# Altium PCB rtls.PcbDoc
Units mil, origin at the board's own origin, x right, y up, seen from the top; angles counter-clockwise.
Board outline 3741 x 1772 mil, 2 copper layers (Top Layer, Bottom Layer), stack 61.756 mil thick; 78 components, 68 nets, 274 pads, 103 vias.
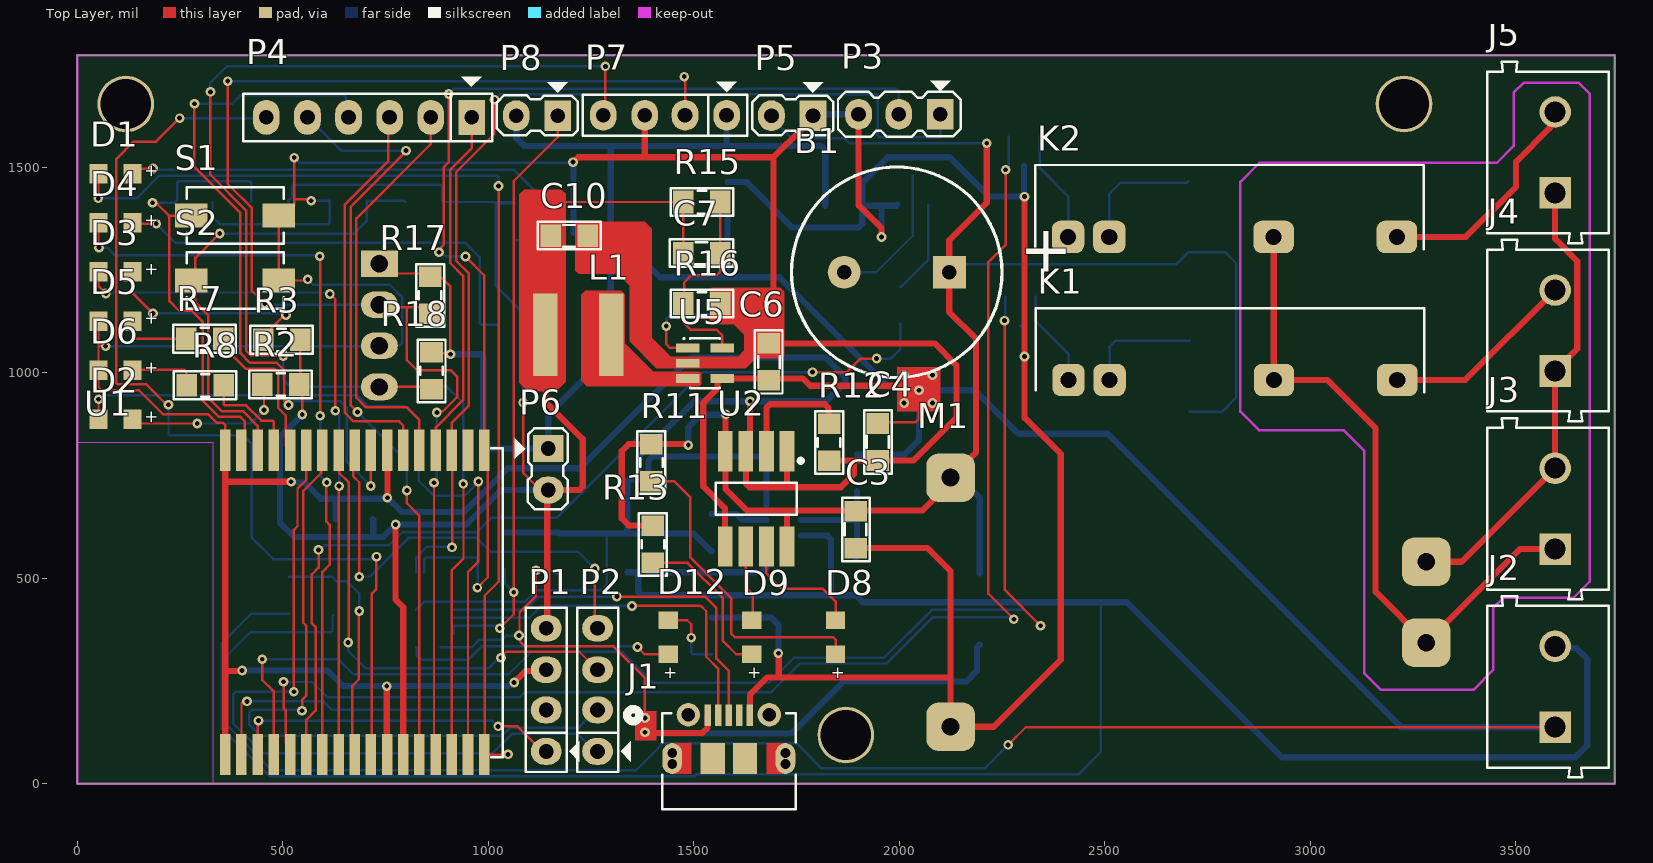
[diagram p0: Top Layer view]
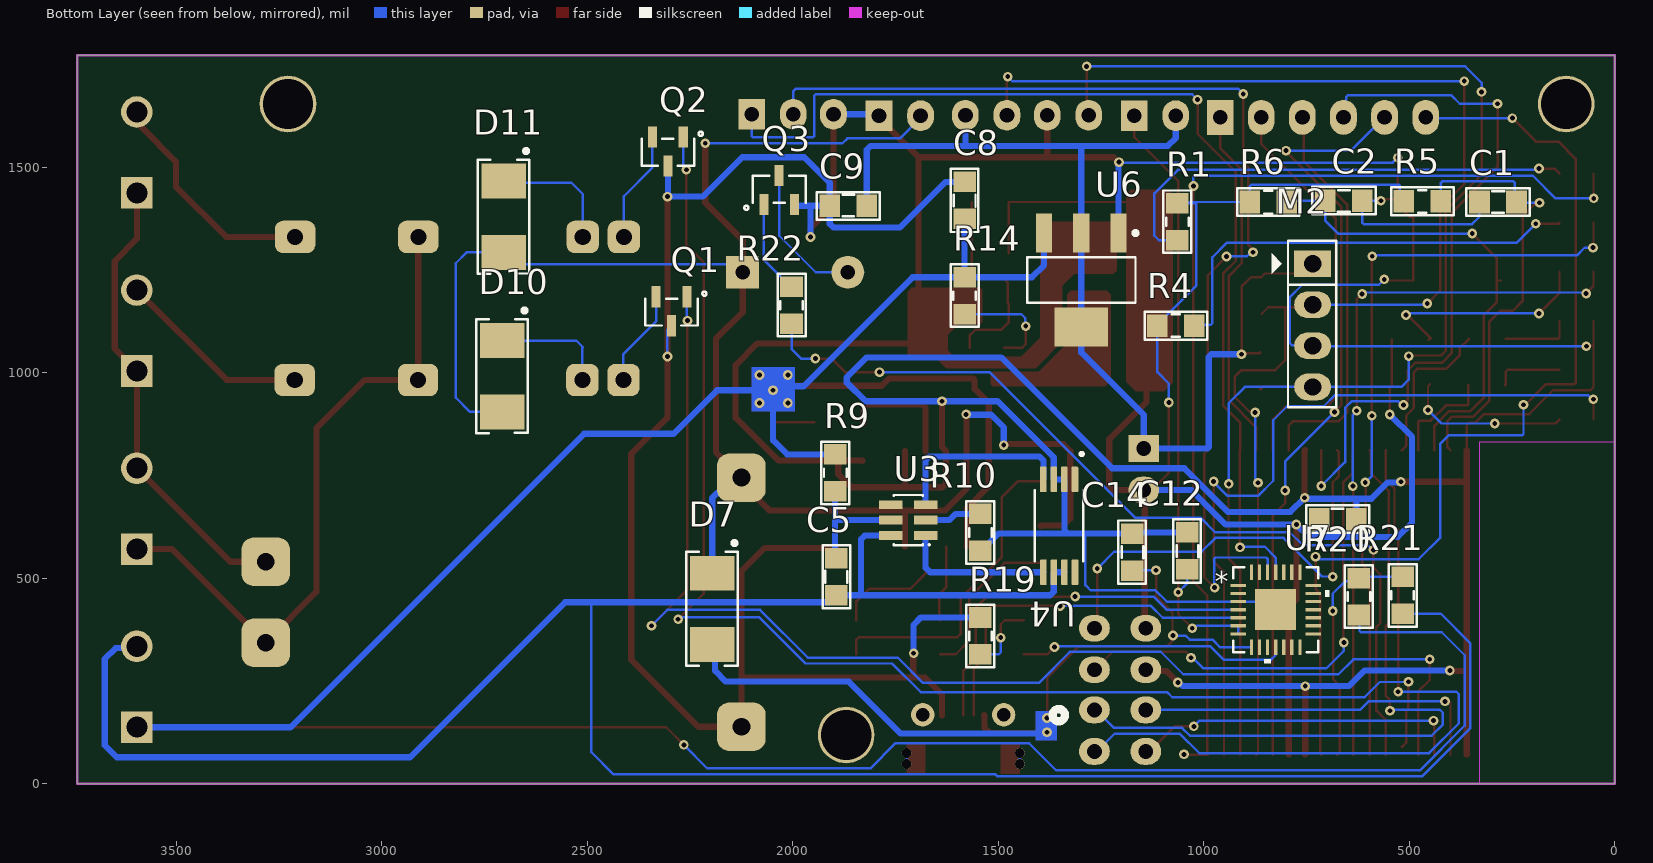
[diagram p1: Bottom Layer view, seen from below]
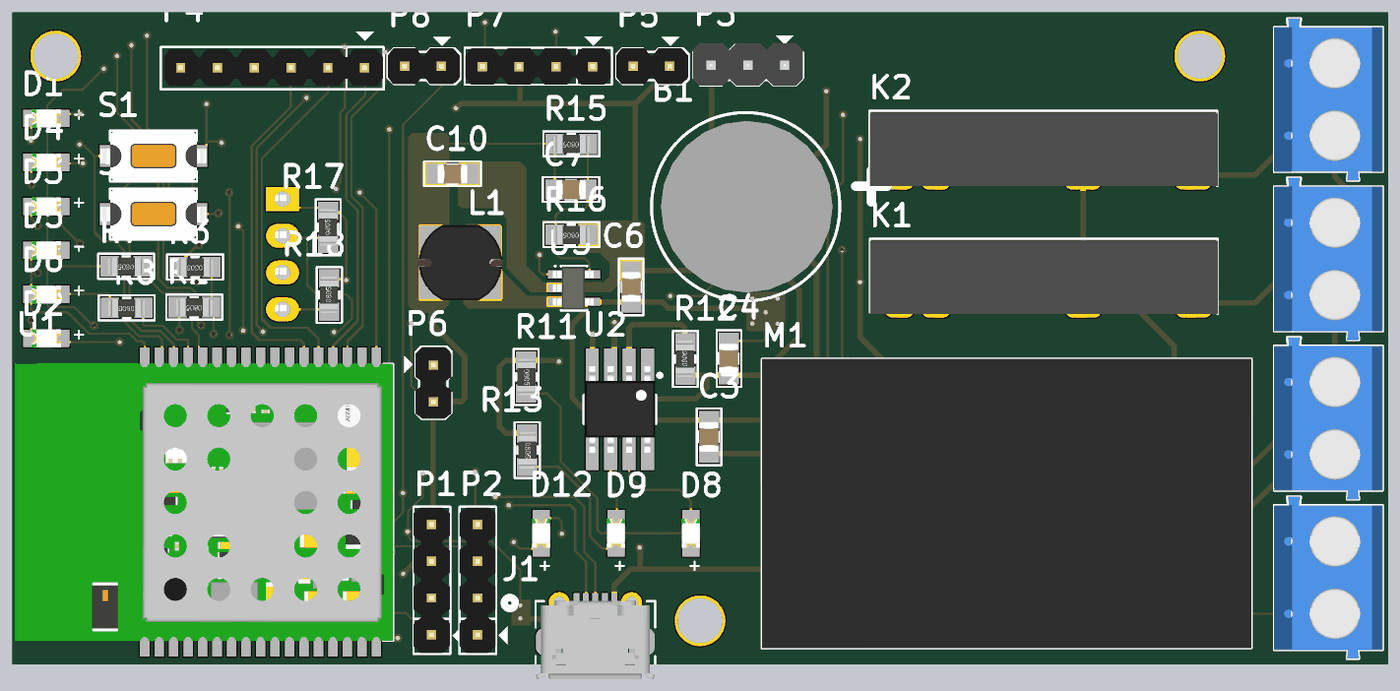
[diagram p2: 3D render of the assembled board from above, using the file's embedded part models]
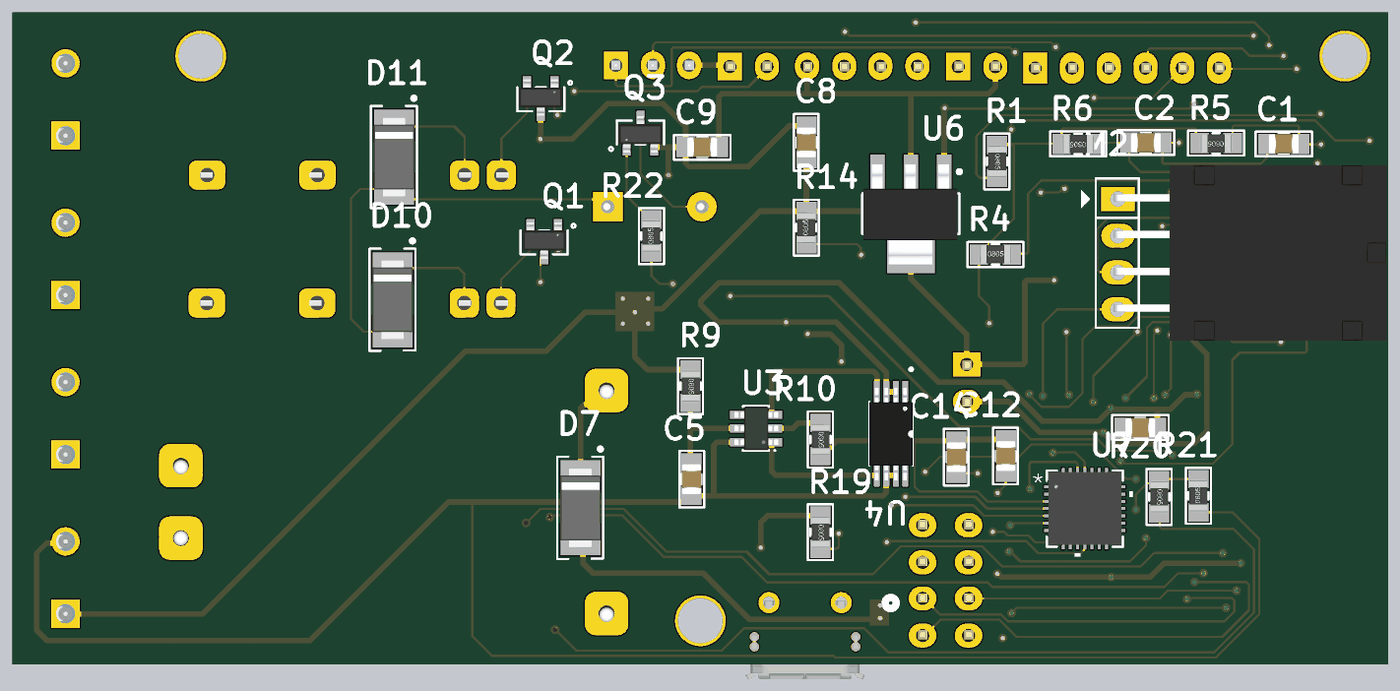
[diagram p3: 3D render of the assembled board from below, using the file's embedded part models]

## Layer stack, top to bottom
Top Solder: solder mask 1, SM-001, Dk 4
Top Layer: signal copper 1.378
Dielectric 1: core 59, Core-043, Dk 4.3
Bottom Layer: signal copper 1.378
Bottom Solder: solder mask 1, SM-001, Dk 4

## Board outline
0,0 0,1772 3741,1772 3741,0

## Design rules (kind name [scope] priority, off if disabled: settings)
Clearance [All] p1: gap=8 ignorepadtopadclearanceinfootprint=FALSE
HoleSize [All] p1: absolutevalues=TRUE maxlimit=157.48 minlimit=11.81 maxpercent=80.000 minpercent=20.000
HoleToHoleClearance [All] p1: gap=3 allowstackedmicrovias=TRUE
MinimumSolderMaskSliver [All] p1: minsoldermaskwidth=0
PlaneConnect [All] p1: planeconnectstyle=Direct reliefexpansion=20 reliefentries=4 reliefconductorwidth=10 reliefairgap=10
PolygonConnect [All] p1: connectstyle=Relief reliefconductorwidth=10 reliefentries=4 polygonreliefangle="90 Angle" airgapwidth=10
RoutingVias [All] p1: holewidth=11.81 width=23.62 viastyle="Through Hole" minholewidth=11.81 minwidth=23.62 maxholewidth=11.81 maxwidth=23.62
SilkToSilkClearance [All] p1: silktosilkclearance=0
SilkToSolderMaskClearance [IsPad] p1: minsilkscreentomaskgap=0 clearancetoexposedcopper=TRUE
SolderMaskExpansion [All] p1: expansion=4 istentingtop=FALSE
Width [All] p1: maxlimit=15 minlimit=6 preferedwidth=10
24 further rules are at their usual default settings.

## Classes and differential pairs
component class serial: C12 C14 D12 P8 R19 U7
component class power_supply: C3 C4 C5 C6 C7 C8 C9 C10 D7 D8 D9 J1 J2 J3 L1 M1 P5 P6 R9 R10 R11 R12 R13 R14 R15 R16 R20 R21 U2 U3 U4 U5 U6
component class main: "   " C1 C2 D1 D2 D3 D4 D5 D6 P1 P2 P4 R1 R2 R3 R4 R5 R6 R7 R8 S1 S2 U1
component class io_sensor: B1 D10 D11 J4 J5 K1 K2 M2 P7 Q1 Q2 Q3 R17 R18 R22

## Components (designator, comment, footprint, x,y, rotation, side; value= is the part's Value field where it differs from the comment)
B1 "Buzzer" BUZZER 2121.91,1244 r180 top locked
C1 "Cap-100nF-50V-0805" CAP-SM-0805 329,1415 r180 bottom value=100nF/50V
C2 "Cap-100nF-50V-0805" CAP-SM-0805 614,1418 r0 bottom value=100nF/50V
C3 "Cap-10uF-50V-0805" CAP-SM-0805 1894,573 r90 top value=10uF/50V
C4 "Cap-10uF-50V-0805" CAP-SM-0805 1948,786 r90 top value=10uF/50V
C5 "Cap-100nF-50V-0805" CAP-SM-0805 1894,458 r90 bottom value=100nF/50V
C6 "Cap-4.7uF-50V-0805" CAP-SM-0805 1683,1071 r270 top value=4.7uF/50V
C7 "Cap-22pF-50V-0805" CAP-SM-0805 1564,1290.5 r180 top value=1nF/50V
C8 "Cap-10uF-50V-0805" CAP-SM-0805 1582,1464 r270 bottom value=10uF/50V
C9 "Cap-100nF-50V-0805" CAP-SM-0805 1910,1406 r180 bottom value=100nF/50V
C10 "Cap-10uF-50V-0805" CAP-SM-0805 1242,1333 r180 top value=10uF/50V
C12 "Cap-100nF-50V-0805" CAP-SM-0805 1040,611 r270 bottom value=100nF/50V
C14 "Cap-100nF-50V-0805" CAP-SM-0805 1174,608 r270 bottom value=100nF/50V
C15 "Cap-100nF-50V-0805" CAP-SM-0805 629,643 r0 bottom value=100nF/50V
D1 "Red, 2V" WL-SMCW_0805 93,1484 r0 top
D2 "Green, 3.2V" WL-SMCW_0805 93,886 r0 top
D3 "Blue, 3.2V" WL-SMCW_0805 93,1244.8 r0 top
D4 "Yellow, 2V" WL-SMCW_0805 93,1364.4 r0 top
D5 "Red, 2V" WL-SMCW_0805 93,1125.2 r0 top
D6 "Red, 2V" WL-SMCW_0805 93,1005.6 r0 top
D7 "SS24" SS24 2196,425 r270 bottom
D8 "Red, 2V" WL-SMCW_0805 1845,356 r270 top
D9 "Green, 3.2V" WL-SMCW_0805 1641.5,356 r270 top
D10 "SS24" SS24 2707,991 r270 bottom
D11 "SS24" SS24 2703,1379 r270 bottom
D12 "Red, 2V" WL-SMCW_0805 1438,356 r270 top
J1 "105017-0001" MICRO-USB-FEMALE 1585.37,54.32 r0 top
J2 "691102710002" 691102710002 3578.28,235.42 r90 top locked
J3 "691102710002" 691102710002 3578.28,668.81 r90 top locked
J4 "691102710002" 691102710002 3578.28,1102.19 r90 top locked
J5 "691102710002" 691102710002 3578.28,1535.57 r90 top locked
K1 "G3MB-202P DC5" G3MB 2412,982 r0 top
K2 "G3MB-202P DC5" G3MB 2411,1330 r0 top
L1 "2.2uH/3.5A" CD53 1219,1092 r180 top
M1 "HLK-PM01" HLK-PM01 3282.48,539.57 r180 top locked
M2 "AM2320" AM2320 735,1265 r270 bottom locked
P1 "Header 4" JP4 1141,178 r90 top locked
P2 "Header 4" JP4 1266,178 r90 top locked
P3 "Header 3" JP3 2000,1628.5 r180 top
P4 "Header 6" JP6 960,1621 r180 top
P5 "Header 2" JP2 1790,1625 r180 top
P6 "Header 2" JP2 1146,815 r270 top
P7 "Header 4" JP4 1480,1626 r180 top
P8 "Header 2" JP2 1169,1625 r180 top
Q1 "IRLML6402TRPBF" SOT23_NEX 2295,1147 r0 bottom
Q2 "IRLML6402TRPBF" SOT23_NEX 2304,1536 r0 bottom
Q3 "MMBT3904-1AM" SOT23_NEX 2033,1446 r180 bottom
R1 "Res-1K-0805" RES-SM-0805 1064,1412 r270 bottom value=1K
R2 "Res-1K-0805" RES-SM-0805 540,971 r180 top value=1K
R3 "Res-1K-0805" RES-SM-0805 542,1080 r180 top value=1K
R4 "Res-1K-0805" RES-SM-0805 1113,1114 r180 bottom value=1K
R5 "Res-10k-0805" RES-SM-0805 423,1417 r0 bottom value=10K
R6 "Res-10k-0805" RES-SM-0805 798,1415 r0 bottom value=10K
R7 "Res-1K-0805" RES-SM-0805 355,1082 r180 top value=1K
R8 "Res-1K-0805" RES-SM-0805 356,969 r180 top value=1K
R9 "Res-100-0805" RES-SM-0805 1897,801 r270 bottom value=100
R10 "Res-1K-0805" RES-SM-0805 1544,656 r270 bottom value=1K
R11 "Res-1K-0805" RES-SM-0805 1397,826 r270 top value=1K
R12 "Res-1.2K-0805" RES-SM-0805 1830,785 r90 top value=1.2K
R13 "Res-1K-0805" RES-SM-0805 1400,627 r270 top value=1K
R14 "Res-10k-0805" RES-SM-0805 1582,1142 r90 bottom value=10K
R15 "Res-47K-0805" RES-SM-0805 1565,1415 r180 top value=47K
R16 "Res-10k-0805" RES-SM-0805 1565,1168 r180 top value=10K
R17 "Res-4.7K-0805" RES-SM-0805 859,1143 r90 top value=4.7K
R18 "Res-4.7K-0805" RES-SM-0805 862,959 r90 top value=4.7K
R19 "Res-1K-0805" RES-SM-0805 1544,404 r270 bottom value=1K
R20 "Res-12K-0805" RES-SM-0805 623,500 r270 bottom value=12K
R21 "Res-10k-0805" RES-SM-0805 516,413 r90 bottom value=10K
R22 "Res-15K-0805" RES-SM-0805 2003,1119 r90 bottom value=15K
S1 "434113043826" 434113043826 384,1382 r0 top locked
S2 "434113043826" 434113043826 384,1224 r0 top locked
U1 "DWM1001" DWM1001 1035.39,64.15 r90 top locked
U2 "TP4056" SOP8 1573.89,809.51 r270 top locked
U3 "DW01A" SOT-23-6 1719,641 r90 bottom
U4 "FS8205A" TSSOP8 1351.8,627.01 r270 bottom
U5 "RT8059" SOT-23-5 1527.32,1022.6 r270 top locked
U6 "AMS1117" SOT223 1298,1225 r270 bottom
U7 "CP2102-GM" QFN28_5X5_SIL 825,423 r180 bottom

## Footprints (in the part's own frame and the unit in brackets; to place one, negate y for a bottom-side part, rotate by r counter-clockwise, add the part's x,y. Pads: shape width x height; smd on the part's side, far side on the other; paste and mask are expansions set on the pad)
434113043826 [mm] "SMD Tact Switch, body 6x3.5mm"
  rect 2x1.5 smd: 1(-2.7,0) 2(2.7,0)
  silkscreen extent -3,-1.75 3,1.75, body extent -3.65,-1.75 3.65,1.75, height 4.3
691102710002 [mm] "5,00mm - modular - blue - Horizontal entry with pressure clamp - 9,9 mm height - 02p"
  rect 1.95x1.95 hole 1.3: 1(-2.5,-0.45)
  round 1.95 hole 1.3: 2(2.5,-0.45)
  silkscreen extent -5.6,-3.75 5.6,3.75, body extent -5.6,-3.75 5.6,3.75, height 9.96
AM2320 [mil]
  rect 65x90 hole 42: 1(0,0)
  oval 65x90 hole 42: 2(100,0) 3(200,0) 4(300,0)
  silkscreen extent -56,-100 350,57, body extent -91,-11 385,731, height 192
BUZZER [mil]
  rect 80x80 hole 36: 1(0,0)
  round 80 hole 36: 2(255.91,0)
  silkscreen extent -128,-256 384,256, body extent -108,-233 358,233, height 226
CAP-SM-0805 [mil]
  rect 50x55 smd: 1(0,0) 2(90,0)
  silkscreen extent -32,-34 122,33, body extent 4,-27 86,27, height 30
CD53 [mil]
  rect 60x200 smd: 1(-80,0) 2(80,0.01)
  body extent -114,-102 114,102, height 177
DWM1001 [mm] "DWM1001 MODULE"
  rect 2.54x0.65 smd: 1(0.16,17.15) 2(0.16,16.15) 3(0.16,15.15) 4(0.16,14.15) 5(0.16,13.15) 6(0.16,12.15) 7(0.16,11.15) 8(0.16,10.15) 9(0.16,9.15) 10(0.16,8.15) 11(0.16,7.15) 12(0.16,6.15) 13(0.16,5.15) 14(0.16,4.15) 15(0.16,3.15) 16(0.16,2.15) 17(0.16,1.15) 18(18.97,1.15) 19(18.97,2.15) 20(18.97,3.15) 21(18.97,4.15) 22(18.97,5.15) 23(18.97,6.15) 24(18.97,7.15) 25(18.97,8.15) 26(18.97,9.15) 27(18.97,10.15) 28(18.97,11.15) 29(18.97,12.15) 30(18.97,13.15) 31(18.97,14.15) 32(18.97,15.15) 33(18.97,16.15) 34(18.97,17.15)
  silkscreen extent 0,0 19.1,0.7, body extent 0,0 19.13,26.13, height 4.6
G3MB [mm]
  rrect50% 2.5x2 hole 1: 1(20.32,0) 2(12.7,0)
  rrect50% 2x2 hole 1: 3(2.54,0) 4(0,0)
  silkscreen extent -2.03,-0.76 21.97,4.44, body extent -2.03,-0.76 22.02,4.32, height 20.74
HLK-PM01 [mm]
  rrect50% 3x3 hole 1.1: 1(0,5) 2(0,0) 3(29.4,10.2) 4(29.4,-5.2)
  body extent -2.3,-7.5 31.7,12.7, height 15
JP2 [mil]
  rect 65x75 hole 36: 1(0,0)
  oval 65x75 hole 36: 2(101,0)
  silkscreen extent -49,-81 148,48, body extent -48,-50 148,48, height 323
JP3 [mil] "Jumper 3"
  rect 65x75 hole 36: 1(-100,0)
  oval 65x75 hole 36: 2(1,0) 3(99,0)
  silkscreen extent -150,-81 149,55, body extent -150,-60 150,55, height 355
JP4 [mil] "Jumper 4"
  oval 65x75 hole 36: 1(-100,0) 2(1,0) 3(99,0) 4(200,0)
  silkscreen extent -150,-81 250,50, body extent -148,-48 248,50, height 323
JP6 [mil] "JP6"
  rect 65x85 hole 36: 1(0,0)
  oval 65x85 hole 36: 2(100,0) 3(200,0) 4(300,0) 5(400,0) 6(500,0)
  silkscreen extent -50,-99 556,58, body extent -48,-50 548,48, height 323
MICRO-USB-FEMALE [mil]
  rect 16x53 smd: 1(-51.18,112) 2(-25.59,112) 3(0,112) 4(25.59,112) 5(51.18,112)
  round 57 hole 33: 6(-98.43,112.98) 7(98.43,112.98)
  rect 59x75 smd: 10(-39.37,6.68) 11(39.37,6.68)
  oval 48x75 smd: S_1(-137.8,6.68)
  round 24 hole 24: S_1_H1(-137.8,20.18) S_1_H2(-137.8,-6.82) S_2_H1(137.8,20.18) S_2_H2(137.8,-6.82)
  oval 48x75 smd mask+0: S_2(137.8,6.68)
  Top Layer region: -91.8,-30.82 -91.8,44.18 -137.8,44.18 -137.8,-30.82
  Top Layer region: 91.8,-30.82 91.8,44.18 137.8,44.18 137.8,-30.82
  Multi-Layer lines w6: -137.8,-6.82 -137.8,20.18 ; 137.8,-6.82 137.8,20.18
  silkscreen extent -247,-117 162,127, body extent -161,-95 161,118, height 108
QFN28_5X5_SIL [mil]
  rect 38x8 smd: 1(-91.5,59.06) 2(-91.5,39.37) 3(-91.5,19.68) 4(-91.5,0) 5(-91.5,-19.68) 6(-91.5,-39.37) 7(-91.5,-59.06) 15(91.5,-59.06) 16(91.5,-39.37) 17(91.5,-19.68) 18(91.5,0) 19(91.5,19.68) 20(91.5,39.37) 21(91.5,59.06)
  rect 8x38 smd: 8(-59.06,-91.5) 9(-39.37,-91.5) 10(-19.68,-91.5) 11(0,-91.5) 12(19.68,-91.5) 13(39.37,-91.5) 14(59.06,-91.5) 22(59.06,91.5) 23(39.37,91.5) 24(19.68,91.5) 25(0,91.5) 26(-19.68,91.5) 27(-39.37,91.5) 28(-59.06,91.5)
  rect 100x100 smd paste-65.5 mask+0: 29(0,0)
  silkscreen extent -104,-130 130,104, body extent -98,-98 99,99, height 37
RES-SM-0805 [mil]
  rect 50x55 smd: 1(0,0) 2(90,0)
  silkscreen extent -31,-34 121,34, body extent -5,-24 95,25, height 20
SOP8 [mm]
  rect 2.5x0.9 smd: 1(0.013,3.889) 2(0.013,2.619) 3(0.013,1.349) 4(0.013,0.079) 5(5.913,0.079) 6(5.913,1.349) 7(5.913,2.619) 8(5.913,3.889)
  silkscreen extent 0.49,-0.52 3.96,4.86, body extent -0.04,-0.47 5.96,4.43, height 1.75
SOT23_NEX [mil]
  rect 22x52 smd paste+0 mask+4: 1(-37.5,-37.21) 2(37.5,-37.21) 3(0,33.36)
  silkscreen extent -85,-50 64,32, body extent -59,-54 59,44, height 43
SOT223 [mm] "SOT223, 4-Leads, Body 6.5x3.5mm, Pitch 2.3mm, Lead Span 7mm, IPC Medium Density"
  rect 2.4x1 smd: 1(-2.9,2.3) 2(-2.9,0) 3(-2.9,-2.3)
  rect 2.4x3.3 smd: 4(2.9,0)
  silkscreen extent -3.02,-3.35 1.4,3.47, body extent -3.39,-3.27 3.5,3.23, height 1.72
SOT-23-5 [mm]
  rect 0.55x1.45 smd: 1(-0.95,-1.075) 2(0,-1.075) 3(0.95,-1.075) 4(0.95,1.075) 5(-0.95,1.075)
  silkscreen extent -1.57,-1.35 1.55,0.9, body extent -1.45,-1.45 1.45,1.35, height 1
SOT-23-6 [mm]
  rect 0.55x1.45 smd: 1(-0.95,-1.075) 2(0,-1.075) 3(0.95,-1.075) 4(0.95,1.075) 5(0,1.075) 6(-0.95,1.075)
  silkscreen extent -1.57,-1.35 1.55,0.9, body extent -1.5,-1.52 1.5,1.48, height 1.45
SS24 [mil] "DO-214-AC/SMA Molded Diode, Body 5.3x2.6mm, IPC Medium Density"
  rect 85x108 smd: 1(-86.61,0) 2(86.61,0)
  silkscreen extent -165,-63 139,62, body extent -108,-55 108,55, height 91
TSSOP8 [mm]
  rrect25% 1.57x0.41 smd: 1(-2.87,0.975) 2(-2.87,0.325) 3(-2.87,-0.325) 4(-2.87,-0.975) 5(2.87,-0.975) 6(2.87,-0.325) 7(2.87,0.325) 8(2.87,0.975)
  silkscreen extent -4.54,-1.5 2.2,1.5, body extent -3.17,-1.51 3.23,1.49, height 1.08
WL-SMCW_0805 [mm] "SMD Mono-color Chip LED, body 2.0x1.25mm"
  rect 1.1x1.2 smd: 1(-1.05,0) 2(1.05,0)
  body extent -1,-0.63 1,0.62, height 0.7

## Part data
B1: Local Supplier Part Number="1209 DIP Buzzer 12x9mm", Local Supplier=thegioiic, Local Supplier Link=https://www.thegioiic.com/products/1209-dip-buzzer-12x9mm
C1 C2 C5 C9 C12 C14 C15: "CAP CER 0.1UF 50V Y5V 0805", Manufacturer="Samsung Electro-Mechanics", Manufacturer Part Number=CL21F104ZBCNNNC, Supplier 1 Part Number=1276-1007-1-ND, Local Supplier=thegioiic, Supplier 1=Digikey, Supplier 1 Link=https://www.digikey.com/product-detail/en/samsung-electro-mechanics/CL21F104ZBCNNNC/1276-1007-1-ND/3889093
  C1 C2 C5 C9 C15: Local Supplier Link=https://www.thegioiic.com/products/tu-gom-0805-100nf-0-1uf-50v
  C12 C14: Local Supplier Link=https://thegioiic.com/products/tu-100nf-0-1uf-50v-0805
C3 C4 C8 C10: "CAP CER 10UF 50V X5R 0805", Manufacturer=Yageo, Manufacturer Part Number=CC0805KKX5R9BB106, Supplier 1 Part Number=311-3499-2-ND, Local Supplier=thegioiic, Local Supplier Link=https://www.thegioiic.com/products/tu-gom-0805-10uf-50v, Supplier 1=Digikey, Supplier 1 Link=https://www.digikey.com/product-detail/en/yageo/CC0805KKX5R9BB106/311-3499-2-ND/7164383
C6: "CAP CER 4.7UF 50V X5R 0805", Manufacturer="Murata Electronics", Manufacturer Part Number=GRM21BR61H475KE51L, Supplier 1 Part Number=490-10751-1-ND, Local Supplier=thegioiic, Local Supplier Link=https://thegioiic.com/products/tu-4-7uf-50v-0805-cap, Supplier 1=Digikey, Supplier 1 Link=https://www.digikey.com/product-detail/en/murata-electronics/GRM21BR61H475KE51L/490-10751-1-ND/5251349
C7: "CAP CER 22PF 100V X7R 0805", Manufacturer="Johanson Dielectrics Inc.", Manufacturer Part Number=101X15W102MV4E, Supplier 1 Part Number=709-1335-1-ND, Local Supplier=thegioiic, Local Supplier Link=https://thegioiic.com/products/tu-1nf-50v-0805, Supplier 1=Digikey, Supplier 1 Link=https://www.digikey.com/product-detail/en/johanson-dielectrics-inc/101X15W102MV4E/709-1335-1-ND/2327235
D1 D5 D6 D8 D12: library part 150080RS75000, "WL-SMCW SMT Mono-color Chip LED Waterclear, size 0805, Red, 2V, 140deg", Emitting Color=Red, Forward Voltage typ.=2V, Operating Temperature="-40 to +85degC", Chip Technology=AlInGaP, ComponentLink1Description=Manufacturer, ComponentLink1URL=http://www.we-online.de, ComponentLink2Description=Datasheet, ComponentLink2URL=https://www.we-online.com/catalog/datasheet/150080RS75000.pdf, Dominant Wavelength typ.=625nm, Luminous Intensity typ.=150mcd, Mounting Technology=SMT, Packaging="Tape and Reel", Part Number=150080RS75000, Peak Wavelength typ.=630nm, Published Date="December 2019", Publisher="Wurth Elektronik", Size=0805, Viewing Angle=140deg
D2 D9: library part 150080GS75000, "WL-SMCW SMT Mono-color Chip LED Waterclear, size 0805, Green, 3.2V, 140deg", Emitting Color=Green, Forward Voltage typ.=3.2V, Operating Temperature="-40 to +85degC", Chip Technology=InGaN, ComponentLink1Description=Manufacturer, ComponentLink1URL=http://www.we-online.de, ComponentLink2Description=Datasheet, ComponentLink2URL=https://www.we-online.com/catalog/datasheet/150080GS75000.pdf, Dominant Wavelength typ.=525nm, Luminous Intensity typ.=450mcd, Mounting Technology=SMT, Packaging="Tape and Reel", Part Number=150080GS75000, Peak Wavelength typ.=515nm, Published Date="December 2019", Publisher="Wurth Elektronik", Size=0805, Viewing Angle=140deg
D3: library part 150080BS75000, "WL-SMCW SMT Mono-color Chip LED Waterclear, size 0805, Blue, 3.2V, 140deg", Emitting Color=Blue, Forward Voltage typ.=3.2V, Operating Temperature="-40 to +85degC", Chip Technology=InGaN, ComponentLink1Description=Manufacturer, ComponentLink1URL=http://www.we-online.de, ComponentLink2Description=Datasheet, ComponentLink2URL=https://www.we-online.com/catalog/datasheet/150080BS75000.pdf, Dominant Wavelength typ.=470nm, Luminous Intensity typ.=145mcd, Mounting Technology=SMT, Packaging="Tape and Reel", Part Number=150080BS75000, Peak Wavelength typ.=465nm, Published Date="December 2019", Publisher="Wurth Elektronik", Size=0805, Viewing Angle=140deg
D4: library part 150080YS75000, "WL-SMCW SMT Mono-color Chip LED Waterclear, size 0805, Yellow, 2V, 140deg", Emitting Color=Yellow, Forward Voltage typ.=2V, Operating Temperature="-40 to +85degC", Chip Technology=AlInGaP, ComponentLink1Description=Manufacturer, ComponentLink1URL=http://www.we-online.de, ComponentLink2Description=Datasheet, ComponentLink2URL=https://www.we-online.com/catalog/datasheet/150080YS75000.pdf, Dominant Wavelength typ.=590nm, Luminous Intensity typ.=120mcd, Mounting Technology=SMT, Packaging="Tape and Reel", Part Number=150080YS75000, Peak Wavelength typ.=595nm, Published Date="December 2019", Publisher="Wurth Elektronik", Size=0805, Viewing Angle=140deg
D7 D10 D11: library part Diode-SS24, "DIODE SCHOTTKY 40V 2A DO214AA", Manufacturer="ON Semiconductor", Supplier 1 Part Number=SS24FSCT-ND, Local Supplier=thegioiic, Local Supplier Link=https://thegioiic.com/products/ss24-smb, Manufacturer Part Number=SS24, Supplier 1=Digikey, Supplier 1 Link=https://www.digikey.com/product-detail/en/on-semiconductor/SS24/SS24FSCT-ND/1626273
J1: library part Micro-USB-Female, "CONN RCPT USB2.0 MICRO B SMD R/A", Local Supplier Part Number=x, Built_By=EMA_Cory, Copyright="Copyright (C) 2018 Accelerated Designs. All rights reserved", Datasheet=https://www.molex.com/pdm_docs/sd/1050170001_sd.pdf, Local Supplier=thegioiic, Local Supplier Link=https://www.thegioiic.com/products/cong-usb-micro-b-2-0-dau-cai-5-chan-smd-v1, Manufacturer_Part_Number=105017-0001, RefDes=RefDes, SourceLibrary=Molex_2020-05-26, Type=DEV, Vendor="Molex Connector Corporation"
J2 J3 J4 J5: "WR-TBL Serie 102 Horizontal Entry Modular, Pressure Clamp, pitch 5mm, 2p", Operating Temperature="-40 to +105degC", Rated Current [UL]=15A, Working Voltage [UL]=250VAC, Application="Pressure Clamp", Compliance="Lead free / RoHS", ComponentLink1Description=Manufacturer, ComponentLink1URL=http://www.we-online.de, ComponentLink2Description=Datasheet, ComponentLink2URL=https://katalog.we-online.de/em/datasheet/691102710002.pdf, Modularity=Yes, Mounting Technology=THT, Packaging=Box, Part Number=691102710002, PCB/Cable/Panel=PCB, Pin Number=2, Pitch=5mm, Published Date="October 2019", Publisher="Wurth Elektronik", Type=Horizontal
K1 K2: "5VDC-220VAC Solid State Relay", Built_By=EMA_Cory, Copyright="Copyright (C) 2018 Accelerated Designs. All rights reserved", Datasheet=https://media.digikey.com/pdf/Data%20Sheets/Omron%20PDFs/G3MB.pdf, Manufacturer_Part_Number="G3MB-202P DC5", RefDes=RefDes, SourceLibrary=Omron_2020-03-27_1, Type=DEV, Vendor=Omron
L1: library part ind-2.2uH-3.5A-CD53
P1 P2 P7: "Header, 4-Pin", Local Supplier Part Number=x, LatestRevisionDate=17-Jul-2002, LatestRevisionNote="Re-released for DXP Platform.", Local Supplier=thegioiic, Local Supplier Link=https://www.thegioiic.com/products/hang-rao-duc-don-2-54mm-40-chan-1-hang-cao-11-4mm-xuyen-lo, Publisher="Altium Limited"
P3: "Header, 3-Pin", Local Supplier Part Number=x, LatestRevisionDate=17-Jul-2002, LatestRevisionNote="Re-released for DXP Platform.", Local Supplier=thegioiic, Local Supplier Link=https://www.thegioiic.com/products/hang-rao-duc-don-2-54mm-40-chan-1-hang-cao-11-4mm-xuyen-lo, Publisher="Altium Limited"
P4: "Header, 6-Pin", Local Supplier Part Number=x, LatestRevisionDate=17-Jul-2002, LatestRevisionNote="Re-released for DXP Platform.", Local Supplier=thegioiic, Local Supplier Link=https://www.thegioiic.com/products/hang-rao-duc-don-2-54mm-40-chan-1-hang-cao-11-4mm-xuyen-lo, Publisher="Altium Limited"
P5 P6 P8: "Header, 2-Pin", Local Supplier Part Number=x, LatestRevisionDate=17-Jul-2002, LatestRevisionNote="Re-released for DXP Platform.", Local Supplier=thegioiic, Local Supplier Link=https://www.thegioiic.com/products/hang-rao-duc-don-2-54mm-40-chan-1-hang-cao-11-4mm-xuyen-lo, Publisher="Altium Limited"
Q1 Q2: "P-Channel 20V 3.7A (Ta) 1.3W (Ta) Surface Mount Micro3™/SOT-23", Local Supplier=thegioiic, Local Supplier Link=https://www.thegioiic.com/products/irlml6402trpbf
R1 R2 R3 R4 R7 R8 R10 R11 R13 R19: "RES 1K OHM 1% 1/4W 0805", Manufacturer="Stackpole Electronics Inc", Manufacturer Part Number=RNCP0805FTD1K00, Supplier 1 Part Number=RNCP0805FTD1K00CT-ND, Local Supplier=thegioiic, Local Supplier Link=https://www.thegioiic.com/products/dien-tro-1-kohm-0805-5, Supplier 1=Digikey, Supplier 1 Link=https://www.digikey.com/product-detail/en/stackpole-electronics-inc/RNCP0805FTD1K00/RNCP0805FTD1K00CT-ND/2240568
R5 R6 R14 R16 R21: "RES 10K OHM 1% 1/4W 0805", Manufacturer="Stackpole Electronics Inc", Manufacturer Part Number=RNCP0805FTD10K0, Supplier 1 Part Number=RNCP0805FTD10K0CT-ND, Local Supplier=thegioiic, Local Supplier Link=https://www.thegioiic.com/products/dien-tro-10-kohm-0805-5, Supplier 1=Digikey, Supplier 1 Link=https://www.digikey.com/product-detail/en/stackpole-electronics-inc/RNCP0805FTD10K0/RNCP0805FTD10K0CT-ND/2240601
R9: "RES 100 OHM 0.1% 1/5W 0805", Manufacturer="Vishay Thin Film", Manufacturer Part Number=PTN0805E10R0BST1, Supplier 1 Part Number=764-1471-1-ND, Local Supplier=thegioiic, Local Supplier Link=https://thegioiic.com/products/dien-tro-10-ohm-0805-5, Supplier 1=Digikey, Supplier 1 Link=https://www.digikey.com/product-detail/en/vishay-thin-film/PTN0805E10R0BST1/764-1471-1-ND/7103255
R12: "RES SMD 1.2K OHM 1% 1/8W 0805", Manufacturer="TE Connectivity Passive Product", Manufacturer Part Number=CRG0805F1K2, Supplier 1 Part Number=A126346CT-ND, Local Supplier=thegioiic, Local Supplier Link=https://thegioiic.com/products/dien-tro-1-2k-ohm-0805-5, Supplier 1=Digikey, Supplier 1 Link=https://www.digikey.com/product-detail/en/te-connectivity-passive-product/CRG0805F1K2/A126346CT-ND/7603401
R15: "RES SMD 47K OHM 1% 1/8W 0805", Manufacturer=Yageo, Manufacturer Part Number=RC0805FR-0747KL, Supplier 1 Part Number=311-47.0KCRCT-ND, Local Supplier=thegioiic, Local Supplier Link=https://thegioiic.com/products/dien-tro-47k-ohm-0603-5, Supplier 1=Digikey, Supplier 1 Link=https://www.digikey.com/product-detail/en/yageo/RC0805FR-0747KL/311-47.0KCRCT-ND/730920
R17 R18: "RES SMD 4.7K OHM 5% 1/8W 0805", Manufacturer=Yageo, Manufacturer Part Number=RC0805JR-074K7L, Supplier 1 Part Number=311-4.7KARCT-ND, Local Supplier=thegioiic, Local Supplier Link=https://www.thegioiic.com/products/dien-tro-4-7-kohm-0805-5, Supplier 1=Digikey, Supplier 1 Link=https://www.digikey.com/product-detail/en/yageo/RC0805JR-074K7L/311-4.7KARCT-ND/731274
R20: "RES 12 KOHM JUMPER 0805", Manufacturer="Vishay Thin Film", Manufacturer Part Number=PAT0805E3121BST1, Supplier 1 Part Number=PAT0805E3121BST1-ND, Local Supplier=icdayroi, Local Supplier Link=https://icdayroi.com/dien-tro-12k-0805-1-goi-50-con, Supplier 1=Digikey, Supplier 1 Link=https://www.digikey.com/product-detail/en/vishay-thin-film/PAT0805E3121BST1/PAT0805E3121BST1-ND/2281536
R22: "RES 15K OHM 1% 1/4W 0805", Manufacturer="TE Connectivity Passive Product", Manufacturer Part Number=CRGCQ0805F15K, Supplier 1 Part Number=A129763CT-ND, Local Supplier=thegioiic, Local Supplier Link=https://www.thegioiic.com/products/dien-tro-15-kohm-0805-5, Supplier 1=Digikey, Supplier 1 Link=https://www.digikey.com/product-detail/en/te-connectivity-passive-product/CRGCQ0805F15K/A129763CT-ND/8577595
S1 S2: "WS-TASV J-Bend SMT Tact Switch 6x3.5mm, height 4.3mm, 260gf", Local Supplier Part Number=x, Operating Temperature="-40 to +85degC", Rated Current=50mA, Rated Voltage=12VDC, ComponentLink1Description=Manufacturer, ComponentLink1URL=http://www.we-online.de, ComponentLink2Description=Datasheet, ComponentLink2URL=https://katalog.we-online.com/em/datasheet/434113043826.pdf, Contact Material="Stainless Steel", Contact Plating=Silver, Height=4.3mm, Local Supplier=thegioiic, Local Supplier Link=https://www.thegioiic.com/products/nut-nhan-3-5x6mm-cao-5mm-2-chan-smd-dau-trang, Mounting Technology=SMT, Operation Force=260gf, Packaging="Tape and Reel", Part Number=434113043826, Published Date="September 2019", Publisher="Wurth Elektronik", Terminal Material="Copper Alloy", Terminal Plating=Silver, Washable=No
U1: Local Supplier Part Number=x, Local Supplier=x, Local Supplier Link=x
U2: "Linear charger for single cell / lithium-ion batteries"
U3: "Battery protection IC"
U5: "High efficiency PWM step-down DC/DC converter"
U6: "Available in 1.8V, 2.5V, 2.85V, 3.3V, 5V, and  Adjustable Versions", Local Supplier=thegioiic, Local Supplier Link=https://www.thegioiic.com/products/ams1117-3-3v
Q3: Local Supplier=thegioiic, Local Supplier Link=https://www.thegioiic.com/products/mmbt3904-1am
U7: Built_By=EMA_UL_Team, Copyright="Copyright (C) 2018 Accelerated Designs. All rights reserved", Local Supplier=thegioiic, Local Supplier Link=https://www.thegioiic.com/products/cp2102, Manufacturer_Part_Number=CP2102-GM, RefDes=RefDes, SourceLibrary=Silicon_Labs_2015-03-23, Type=DEV, Vendor="Silicon Labs"

## Free pads (board coordinates)
  round 137.8 hole 122.05: 0(118.11,1653.54) 0(1870.08,118.11) 0(3228.35,1653.54)

## Via types
v1: diameter 23.62, hole 11.81, Top Layer to Bottom Layer, tented both sides, 103 vias

## Nets (pads, with @x,y where several pads share a name; then routed paths per layer and width w, separated by ;. In a path a pad name is that pad's centre, name@x,y a point inside that pad or via, vN(x,y) a via of type N, cw(c..) or ccw(c..) an arc to the next point about the centre after c; other vN are vias at no path point)
3V3: C9.2 M2.1 P6.1 P7.1 P8.2 R17.2 R18.2 U6.2 U6.4 | length 2706.1
  Top Layer w6: M2.1 759,1241 851,1241 R17.2 860,1232 885,1232 908,1209 908,1049 908.2,1048.8 v1(908.2,1044.42) v1@903.61,1049 ; R18.2 864.52,1046.48 901.09,1046.48 v1@903.61,1049 ; v1@909,1049 v1@903.61,1049
  Bottom Layer w15: v1(908.2,1044.42) 981.58,1044.42 988,1038 988,818.51 991.51,815 P6.1 1146,897 1298,1049 U6.4 U6.2 1298,1551.31 ; P8.2 1068,1570.5 1087.19,1551.31 1298,1551.31 ; P7.1 1580,1551.31 ; C9.2 1820,1542 1810.69,1551.31 1580,1551.31 ; 1298,1551.31 1580,1551.31
3V4: C7.2 C10.2 C15.2 L1.2 P1.4 P6.2 R1.1 R2.1 R3.1 R4.1 R5.2 R6.2 R15.2 U1.12 | length 4632.7
  Top Layer w6: R3.1 542,969 547.49,963.51 v1(547.49,897.69) ; v1(1084.81,927) 1084.81,756.19 1115.71,725.29 1131.29,725.29 1144,738 P6.2@1144,712 ; C10.2 1152,1405 1162,1415 R15.2 1475,1291.5 C7.2
  Top Layer w15: v1(774.57,630.12) 774.57,447.69 793.26,429 U1.12 ; L1.2 1139,929 1230,838 1230,722.79 1221.21,714 P6.2 1144,712 1143.5,711.5 1143.5,380.5 P1.4
  Bottom Layer w6: R5.2 523,1427 523,1455.07 524.43,1456.5 884.49,1456.5 888,1452.99 R6.2 1018,1415 1061,1415 R1.1 1061,1412 1018,1412 1018,1211.5 1113,1116.5 1113,1001 1084.81,972.81 v1(1084.81,927)
  Bottom Layer w15: v1(547.49,897.69) 493,843.2 493,635 528,600 720,600 ; C15.2 720,642 720,600 ; P6.2 1030.5,714 946.5,630 774.69,630 v1(774.57,630.12) 744.45,600 720,600
5V: B1.1 C3.2 D7.1 D10.2 D11.2 M1.4 P5.2 R11.1 R13.1 U2.4 U2.8 | length 4358.9
  Top Layer w15: R13.1@1397.5,627 1396.5,628 1342,628 1325,645 1325,809 1342,826 R11.1 1483.84,826 v1(1486.53,823.31) ; v1(1578.25,898.25) 1577,897 U2.4 1577,717 1630,664 1727,664 ; U2.8 1727,664 ; C3.2 1895,664 2056.62,664 2125,732.38 M1.4 2187,806.3 2187,1082 2121.91,1147.09 B1.1 2121.91,1321.91 2213,1413 v1(2213,1558) ; C3.2@1894.5,664 1727,664
  Bottom Layer w6: P5.2 1689,1620 1739.19,1569.81 1867.19,1569.81 1879,1558 v1(2213,1558) ; B1.1 2141.91,1264 2674.61,1264 D11.2 2793.61,1292.39 2820,1266 2820,939 2785.39,904.39 D10.2
  Bottom Layer w15: v1(1486.53,823.31) 1486.53,866.53 1517.38,897.38 1577.38,897.38 v1(1578.25,898.25) ; M1.4 2162.96,706.34 2184.75,706.34 2196,695.09 D7.1
220V+: J3.1 K1.2 K2.2 M1.1 | length 1625.1
  Top Layer w15: K2.2 2911.5,1329.5 2911.5,982.5 K1.2 3042,982 3159,865 3159,466.2 M1.1 3510.14,570.38 J3.1
220V-: J3.2 J4.1 J5.1 M1.2 | length 1122.5
  Top Layer w15: M1.2 3368.34,539.57 J3.2 J4.1 3650,1057.77 3650,1271 3596,1325 J5.1
DWM_BLE_WK: C2.2 R6.1 S2.1 U1.32 | length 1169.1
  Top Layer w6: S2.1 287.47,1224 S2.1@287.54,1224 ; v1(346.6,1338.19) 287.54,1279.14 S2.1@287.54,1224 ; U1.32 438.93,870 402.93,906 350.94,906 319,937.94 319,1139 287.54,1170.46 S2.1@287.54,1224
  Bottom Layer w6: v1(346.6,1338.19) 673.19,1338.19 704,1369 C2.2 795,1418 R6.1
DWM_nRST: C1.2 R5.1 S1.1 U1.33 | length 1138.4
  Top Layer w6: v1(183,1413) 186.37,1409.63 195.37,1409.63 223,1382 S1.1 ; 224,1382 224,1174 248,1150 279,1150 305,1124 305,932 345,892 397,892 407,882 407,818.44 U1.33
  Bottom Layer w6: v1(183,1413) 237,1413 242.99,1418.99 242.99,1461.49 246.5,1465 419.49,1465 423,1461.49 R5.1
DWM_RX_LED: R8.1 U1.31 | length 254.5
  Top Layer w6: R8.1 356,923.51 359.51,920 410.8,920 447.8,883 474.78,883 478.3,879.49 U1.31
DWM_SCL: M2.4 P7.4 R18.1 U1.15 | length 3398.1
  Top Layer w6: v1(324,1683) 324,1481.2 411,1394.2 411,1052.94 422.44,1041.5 499.61,1041.5 v1(501.23,1039.89) ; M2.4 856,965 R18.1 ; U1.15 911.37,519.37 939.81,547.81 939.81,728.57 v1(939.19,729.19) ; P7.4 1285,1631 v1(1285,1745)
  Bottom Layer w6: v1(324,1683) 324,1705.26 363.74,1745 v1(1285,1745) ; v1(501.23,1039.89) 501.23,982.77 519,965 M2.4 900,965 939.19,925.81 v1(939.19,729.19)
DWM_SDA: M2.2 P7.2 R17.1 U1.14 | length 3437.9
  Top Layer w6: v1(366,1709) 366,1459 425,1400 425,1199.13 v1(456,1168.13) ; R17.1 843,1159 802,1159 ; v1(868,732) 868,74.45 U1.14 ; v1(875,903) 877.72,905.72 889.72,905.72 924,940 924,990 908,1006 826,1006 802,1030 802,1159 ; v1(1477,1720) 1479,1718 P7.2 ; M2.2@749.5,1159 741,1159 M2.2 743.5,1165 M2.2@749.5,1159 ; M2.2@749.5,1159 802,1159
  Bottom Layer w6: v1(366,1709) 1466,1709 v1(1477,1720) ; v1(456,1168.13) 458.76,1165.38 734.62,1165.38 M2.2 ; v1(868,732) 868,736.77 875,743.77 v1(875,903)
DWM_SPI_CLK: P2.2 U1.28 | length 1706.7
  Top Layer w6: v1(547.02,177.19) 547.02,203.21 556.9,213.1 556.9,384.24 549.85,391.29 549.85,711.85 593.51,755.51 593.51,808.11 U1.28
  Bottom Layer w6: v1(547.02,177.19) 544.21,180 426,180 418.19,172.19 418.19,143.55 445.55,116.19 1033.45,116.19 1052.76,135.5 1218.5,135.5 1261,178 P2.2@1266,178
DWM_SPI_CSn: P2.1 U1.29 | length 1776.4
  Top Layer w6: v1(527,223.38) 527,617.26 535.85,626.11 535.85,717.65 557.04,738.84 U1.29
  Bottom Layer w6: v1(527,223.38) 385.12,223.38 379,217.26 379,146.6 451.6,74 1011.06,74 1058.56,121.5 1216.5,121.5 1261,77 P2.1@1266,77
DWM_SPI_MISO: P2.4 U1.26 | length 1107
  Top Layer w6: U1.26 672,807.85 672,747.06 686,733.06 v1(686,503) ; v1(1259,523) 1259,384 P2.4@1266,377
  Bottom Layer w6: v1(686,503) 686.72,503.72 711.98,503.72 805.76,597.5 971.5,597.5 1005,564 1218,564 v1(1259,523)
DWM_SPI_MOSI: P2.3 U1.27 | length 1160.3
  Top Layer w6: U1.27 637.41,809.37 637.41,755.51 660.81,732.11 660.81,344.81 v1(659,343) ; v1(1031,306.19) 1031,308.17 1043.33,320.5 1221.5,320.5 P2.3@1266,276
  Bottom Layer w6: v1(659,343) 659,323 702,280 1001,280 1027.19,306.19 v1(1031,306.19)
DWM_TX_LED: R7.1 U1.30 | length 379.4
  Top Layer w6: R7.1 377.5,1059.5 377.5,1041.5 409.5,1009.5 479.56,1009.5 489,1000.06 489,913.74 507.37,895.37 507.37,821.3 U1.30
GBAT: C5.1 J2.2 R21.1 U3.6 U4.6 U4.7 | length 6051.6
  Bottom Layer w6: R21.1 423,413 351,341 351,135 468,18 1502.76,18 1507.76,23 2437,23 2490,76 2490,441
  Bottom Layer w15: U4.7 U4.6 1365.16,513.44 1365.16,466.79 1373.95,458 1833.79,458 ; U3.6 1761.62,603.3 1825,603.3 1833.79,594.51 1833.79,458 ; J2.2 3600.48,329.37 3647.63,329.37 3674,303 3674,93 3645,64 2931,64 2554,441 2490,441 1911,441 C5.1 1833.79,458
GND: C1.1 C2.1 C3.1 C4.1 C6.1 C8.1 C9.1 C10.1 C12.1 C14.1 C15.1 D5.1 D6.1 J1.5 M1.3 M2.3 P1.3 P3.3 P5.1 P7.3 Q1.3 Q2.3 Q3.2 R10.2 R12.1 R16.1 R19.1 S1.2 S2.2 U1.1 U1.11 U1.24 U1.34 U2.1 U2.3 U4.2 U4.3 U5.2 U6.1 U7.3 U7.29 | length 16467.6
  Top Layer w6: D5.1 51.66,1065.4 ; v1(69,1064) 67.6,1065.4 51.66,1065.4 ; U1.34 360.19,871.81 354,878 339,878 318.19,898.81 207.93,898.81 149.76,956.98 59.02,956.98 51.66,964.34 D6.1 51.66,1065.4 ; v1(528,1523) 528,1421.51 ; v1(560.77,1226.83) 557.94,1224 S2.2 490.3,1377 492.8,1379.5 498.97,1379.5 528,1408.53 528,1421.51 ; v1(569,1418) 565.63,1421.37 556.82,1421.37 556.67,1421.51 528,1421.51 ; U1.11 747.26,77.08 U1.11@753.89,83.71 ; P1.3@1136,277 P1.3
  Top Layer w15: U1.1 360.19,274 ; U1.34 360.19,274 ; 365.63,734.37 v1(520.31,734.37) ; v1(401.09,274.91) 400.19,274 360.19,274 ; v1(753,237) 753,71.34 U1.11 ; U1.24 754.5,810.39 v1(754.5,695.5) ; v1(1063,246) 1091.11,274.11 1133.11,274.11 P1.3@1136,277 ; v1(1206,1512) 1207.1,1512 1219.1,1524 1379,1524 ; P7.3 1381,1526 1379,1524 ; J1.5 1636.55,215.55 1679,258 1707,258 ; v1(1637,930) 1637,819 U2.3 1627,729.79 1635.79,721 1727,721 ; v1(1706,317) 1707,316 1707,258 ; U2.1 1727,721 ; P5.1 1790,1620 1765,1595 1694,1524 ; R12.1 1831,786 1889.5,786 ; C3.1 2069,573 2125,517 2125,258 ; P3.3 1901,1407 1957,1351 v1(1957,1330) ; v1(2305,1428) v1(2305,1038.89) 2305,890 2393,802 2393,301 2230,138 M1.3 2125,258 ; 1379,1524 1694,1524 ; 1694,1524 1694,1082 C6.1 2086,1071 2139,1018 2139,890 2035,786 C4.1 1889.5,786 ; 1707,258 2125,258 ; 1727,721 1858,721 1889.5,752.5 1889.5,786
  Bottom Layer w6: v1(69,1064) 69.5,1064.5 734.5,1064.5 736.49,1066.49 785.49,1066.49 791,1072 791,1183.02 760.3,1213.72 573.89,1213.72 v1(560.77,1226.83) ; C1.1 329,1379 347,1361 610.49,1361 614,1364.51 C2.1 v1(569,1418) ; v1(528,1523) 528.33,1523 540.33,1511 1205,1511 v1(1206,1512) ; U7.29 844.68,442.68 U7.3 1090.09,442.68 1117.41,470 1275,470 1288,483 1288,608 ; 1203,1414.79 1203,1343.62 U6.1 ; R19.1 R19.1@1551.07,396.93 ; Q1.3 2305,1103.64 v1(2305,1038.89) ; v1@2304,1429 v1(2305,1428)
  Bottom Layer w15: v1(401.09,274.91) 609.09,274.91 647,237 v1(753,237) 1051.67,237 1060.67,246 v1(1063,246) ; v1(520.31,734.37) 521.96,732.72 552.28,732.72 592,693 628,693 ; C15.1 628,644 628,693 ; C12.1 1171,611 C14.1 1288,608 1330.21,608 ; v1(1206,1512) 1207.45,1510.55 U6.1 ; R19.1 1688,404 1706,386 v1(1706,317) ; R10.2 1541.5,566 1499.5,608 1330.21,608 ; C8.1 1628,1464 1739,1353 1901.21,1353 1910,1361.79 C9.1 ; P5.1 1793.5,1628.5 P3.3 ; v1(1957,1330) 1957,1406 ; Q3.2 1992.71,1406 1957,1406 ; v1@2304,1429 Q2.3 ; v1(2305,1428) 2219,1428 2123,1524 1972,1524 1910,1462 C9.1 ; 628,693 752,693 v1(754.5,695.5) 789,661 941,661 1047,767 1223,767 1493,1037 1820,1037 1868.79,988.21 1868.79,975.79 1823,930 v1(1637,930) 1501.47,930 1364.88,793.41 1364.88,740.29 U4.3 U4.2 1339,616.79 1330.21,608 ; C9.1 1957,1406
NetB1_2: B1.2 Q3.3 | length 350.2
  Bottom Layer w6: B1.2 1944,1244 2033,1333 Q3.3
NetC5_2: C5.2 R9.2 U3.5 | length 299.9
  Bottom Layer w15: U3.5 1897,641 ; C5.2 1897,551 1897,641 ; R9.2 1897,641
NetC7_1: C7.1 R15.1 R16.2 U5.5 | length 504.1
  Top Layer w6: R15.1 1565,1291.5 C7.1 1564,1245 1556,1237 1495,1237 1477,1219 1477,1170 R16.2 1475,1122 1493,1104 1556,1104 1569.65,1090.35 U5.5
NetC12_2: C12.2 P8.1 U7.6 U7.7 | length 1503.7
  Top Layer w6: v1(1027.81,377.81) 1062,412 v1(1062,465.5) 1062,1466 1169,1573 P8.1
  Bottom Layer w6: U7.7 U7.6 1017.22,383.63 1023.04,377.81 v1(1027.81,377.81) ; C12.2 1040,487.5 v1(1062,465.5)
NetD1_1: D1.1 U1.17 | length 2536.4
  Top Layer w6: v1(51,1423.78) 51.66,1424.44 D1.1 ; v1(1025,1454) 1025,491 991,457 991,71.34 U1.17 1047.45,70.45 v1(1048,71)
  Bottom Layer w6: v1(51,1423.78) 143.88,1423.78 199.1,1479 1021.49,1479 1025,1475.49 v1(1025,1454)
NetD1_2: D1.2 R1.2 | length 1179.3
  Top Layer w6: D1.2 146.69,1496.35 v1(184.19,1496.35)
  Bottom Layer w6: v1(184.19,1496.35) 187.53,1493 1063,1493 1120,1436 1120,1333 1109,1322 R1.2
NetD2_1: D2.1 U1.16 | length 1854.7
  Top Layer w6: D2.1 51.66,934.66 v1(52,935) ; U1.16 950.74,514.94 976,540.2 v1(976,735)
  Bottom Layer w6: v1(52,935) 54.89,935 64.33,944.43 681.55,944.43 708.1,917.88 796.92,917.88 831,883.8 831,736.74 867.74,700 942.26,700 976,733.74 v1(976,735)
NetD2_2: D2.2 R2.2 | length 401.8
  Top Layer w6: D2.2 144.34,876 v1(292,876) ; R2.2 454.37,966.63 v1(454.37,908.68)
  Bottom Layer w6: v1(292,876) 421.69,876 v1(454.37,908.68)
NetD3_1: D3.1 U1.8 | length 1738
  Top Layer w6: D3.1 51.66,1210.26 v1(69.61,1192.31) ; v1(614.58,1190.91) 628,1177.49 v1(628,907.19) ; U1.8 636.19,70.86 636.19,722.56 v1(637.14,723.52)
  Bottom Layer w6: v1(69.61,1192.31) 72.11,1194.81 610.67,1194.81 v1(614.58,1190.91) ; v1(628,907.19) 628,906.2 637.25,896.94 637.25,726.39 637.14,726.28 v1(637.14,723.52)
NetD3_2: D3.2 R3.2 | length 535.9
  Top Layer w6: D3.2 134.34,1193.66 v1(184.13,1143.88) ; R3.2 448,1084 504,1140 v1(508,1140)
  Bottom Layer w6: v1(184.13,1143.88) 504.12,1143.88 v1(508,1140)
NetD4_1: D4.1 U1.7 | length 1834.6
  Top Layer w6: v1@51.66,1314.66 D4.1 ; v1(53,1304) 53,1310 v1@55,1312 ; v1(590,1283) 591,1282 v1(591,895) ; U1.7 596.41,514.91 613.81,532.31 613.81,629.45 606,637.26 606,731.86 v1(606.9,732.77)
  Bottom Layer w6: v1(53,1304) 73,1304 92,1285 588,1285 v1(590,1283) ; v1(591,895) 591,748.67 v1(606.9,732.77)
NetD4_2: D4.2 R4.2 | length 1086.5
  Top Layer w6: D4.2 136.81,1361.92 v1(192.19,1361.92)
  Bottom Layer w6: v1(192.19,1361.92) 192.7,1361.92 239.24,1315.38 944.22,1315.38 979,1280.6 979,1120 983,1116 1021,1116 R4.2
NetD5_2: D5.2 R7.2 | length 171.8
  Top Layer w6: D5.2 134.34,1085.51 137.85,1082 R7.2
NetD6_2: D6.2 R8.2 | length 166.9
  Top Layer w6: D6.2 135.74,1007 260.24,1007 265.26,1001.99 265.26,969.74 R8.2
NetD8_1: D8.1 U2.7 | length 307.5
  Top Layer w6: U2.7 1677,511 1714,474 1814,474 1816.98,471.02 1845,443 D8.1
NetD8_2: D8.2 R11.2 | length 779.1
  Top Layer w6: R11.2 1452,736 1491,697 1491,551 1591,451 1591,365 1600,356 1839,356 1845,350 D8.2
NetD9_1: D9.1 U2.6 | length 187.5
  Top Layer w6: U2.6 1627,477 1644,460 1644,399.84 D9.1
NetD9_2: D9.2 R13.2 | length 394.5
  Top Layer w6: R13.2 1485,537 1571,451 1571,347 1603.34,314.66 D9.2
NetD10_1: D10.1 K1.3 | length 282.7
  Bottom Layer w6: K1.3 2512,1061 2511.07,1061.93 2526.76,1077.61 D10.1
NetD11_1: D11.1 K2.3 | length 309.1
  Bottom Layer w6: K2.3 2511,1434 2539,1462 2699.39,1462 D11.1
NetD12_1: D12.1 R19.2 | length 180.8
  Top Layer w6: D12.1 1484.34,397.34 1494,387.68 v1(1494,355)
  Bottom Layer w6: v1(1494,355) 1494,319 1499,314 R19.2
NetD12_2: D12.2 U7.11 | length 658.4
  Top Layer w6: v1(1363,332) 1380.34,314.66 D12.2
  Bottom Layer w6: U7.11 826,330.5 826,311.63 836.13,301.5 951.5,301.5 984.5,334.5 1360.5,334.5 v1(1363,332)
NetJ1_2: J1.2 U7.5 | length 896.3
  Top Layer w6: v1(1350,432) 1517.62,432 1530.5,419.12 1530.5,308.5 1560,279 1560,166.54 J1.2
  Bottom Layer w6: U7.5 1099.8,403.32 1128.48,432 v1(1350,432)
NetJ1_3: J1.3 U7.4 | length 936.6
  Top Layer w6: v1(1313,455) 1527,455 1555,427 1555,304 1585.37,273.63 J1.3
  Bottom Layer w6: U7.4 1090.26,423 1122.26,455 v1(1313,455)
NetJ4_2: J4.2 K1.1 | length 474.6
  Top Layer w15: K1.1 3377.38,982 J4.2
NetJ5_2: J5.2 K2.1 | length 561.9
  Top Layer w15: K2.1 3379,1330 3501,1452 3501,1513 3583.22,1595.22 3583.22,1621.22 J5.2
NetK1_4: K1.4 Q1.2 | length 235.1
  Bottom Layer w6: Q1.2 2332.5,1124.5 2412,1045 K1.4
NetK2_4: K2.4 Q2.2 | length 272
  Bottom Layer w6: Q2.2 2341.5,1498.5 2411,1429 K2.4
NetL1_1: L1.1 U5.3 | length 302.3
  Top Layer w6: 1294.8,985.2 U5.3 ; L1.1 1299,1022 L1.1@1328.8,992.2
NetP1_1: P1.1 U1.3 | length 814.5
  Top Layer w6: U1.3 438.93,150.93 v1(441,153) ; v1(1024,139) 1070.75,139 1131.75,78 P1.1
  Bottom Layer w6: v1(441,153) 1010,153 v1(1024,139)
NetP1_2: P1.2 U1.2 | length 877.6
  Top Layer w6: U1.2 399.56,196.49 399.7,196.63 409.44,196.63 v1(412.81,200)
  Bottom Layer w6: v1(412.81,200) 598.95,200 619.95,179 P1.2
NetP3_1: P3.1 U1.20 U7.25 | length 2537.7
  Top Layer w6: v1(912,574.69) 912,810.37 U1.20 911.37,878.29 953,919.92 953,1240.8 922,1271.8 922,1488 1015,1581 v1(1015,1664)
  Bottom Layer w6: U7.25 825,550 851,576 910.69,576 v1(912,574.69) ; v1(1015,1664) 1028,1677 1944.49,1677 1948,1673.49 1948,1575.51 1951.51,1572 2096.49,1572 2100,1575.51 P3.1
NetP3_2: P3.2 U1.18 U7.26 | length 2697.4
  Top Layer w6: v1(880,1292.57) 880,1299.33 892,1311.33 892,1500 904,1512 v1(904,1678) ; v1(944.81,1282.53) 944.81,1282.06 990,1236.87 990,811.11 U1.18 998.81,802.3 998.81,501.95 v1(973.55,476.69)
  Bottom Layer w6: U7.26 844.68,546.49 848.2,550 971.49,550 975,546.49 975,478.14 v1(973.55,476.69) ; v1(880,1292.57) 880.21,1292.78 885.18,1292.78 895.43,1282.53 v1(944.81,1282.53) ; v1(904,1678) 917,1691 1991.7,1691 1999,1683.7 P3.2
NetP4_1: P4.1 U1.21 | length 872.1
  Top Layer w6: U1.21 872.49,811.49 872.49,866.49 939,933 939,1235 908,1266 908,1494 960,1546 P4.1
NetP4_2: P4.2 U1.22 | length 1007
  Top Layer w6: U1.22 832.63,884.86 802.49,915 702.77,915 679,938.77 679,1375 860,1556 P4.2
NetP4_3: P4.3 U1.23 | length 979
  Top Layer w6: P4.3 757.01,1618.01 757.01,1515.01 651,1409 651,902.25 672.18,881.07 782.93,881.07 784.98,879.02 793.26,870.74 U1.23
NetP4_4: P4.4 U1.25 | length 1749.9
  Top Layer w6: v1(285,1654) 285,1500.4 397,1388.4 397,1047.14 420.64,1023.5 485.36,1023.5 504,1004.86 504,931 v1(513.81,921.19) ; v1(714,724.16) 714.52,724.68 U1.25
  Bottom Layer w6: v1(285,1654) 377,1654 397.5,1674.5 649.5,1674.5 653,1671 653,1628 P4.4 ; v1(513.81,921.19) 517.33,921.19 526.14,930 640.26,930 656,914.26 656,782.16 v1(714,724.16)
NetP4_5: P4.5 U1.13 | length 1868.5
  Top Layer w6: v1(681.63,903.88) 681.63,904.63 665,921.25 665,1403.2 800,1538.2 v1(800,1540) ; v1(802,713) 802,682 832.63,651.37 U1.13
  Bottom Layer w6: P4.5 561.09,1621 642.09,1540 v1(800,1540) ; v1(681.63,903.88) 802,783.51 v1(802,713)
NetP4_6: P4.6 U1.10 | length 2438.6
  Top Layer w6: v1(222,921.62) 217.38,921.62 168.02,970.98 98.51,970.98 95,974.49 95,1520 137,1562 192,1562 v1(249,1619) ; P4.6@455.93,1625.07 P4.6 ; U1.10 716,71.93 716,461.17 728,473.17 v1(728,552)
  Bottom Layer w6: v1(222,921.62) 222,850.51 225.51,847 404,847 424,827 424,599 477.31,545.69 721.69,545.69 v1(728,552) ; v1(249,1619) 446,1619 454,1627 P4.6
NetQ1_1: Q1.1 U1.4 | length 3132.9
  Top Layer w6: v1(450,302.22) 450,251.81 478.3,223.51 U1.4 ; v1(2256.25,1126.31) 2256.25,471.75 v1(2344,384)
  Bottom Layer w6: v1(450,302.22) 635.98,302.22 672.2,266 1050,266 1104.5,320.5 1325.5,320.5 1401,245 1683.26,245 1744.26,306 1963.2,306 2079.7,422.5 2305.5,422.5 v1(2344,384) ; v1(2256.25,1126.31) 2257.5,1127.56 Q1.1
NetQ2_1: Q2.1 U1.5 | length 3263.5
  Top Layer w6: v1(502,247.59) 502,183.2 507.37,177.83 507.37,99.35 U1.5@517.67,89.05 ; v1(2258.89,1493.51) 2258.89,1310.79 2217,1268.9 2217,461.69 v1(2279,399.69)
  Bottom Layer w6: v1(502,247.59) 503.41,247.59 504,247 571.75,247 608.75,210 1076.55,210 1089.05,222.5 1688.6,222.5 1758.1,292 1969,292 2082.01,405.01 2275.01,405.01 2275.01,403.68 v1(2279,399.69) ; v1(2258.89,1493.51) 2262.4,1497.03 2266.5,1497.03 Q2.1
NetQ3_1: Q3.1 R22.2 | length 229.2
  Bottom Layer w6: R22.2 2005.5,1209 2070.5,1274 Q3.1
NetR10_1: R10.1 U3.2 | length 138.9
  Bottom Layer w15: R10.1 1603.98,656 1618.98,641 U3.2
NetR12_2: R12.2 U2.2 | length 303.4
  Top Layer w15: U2.2 1677,914.21 1685.79,923 1819,923 1828.29,913.71 1828.29,876.71 R12.2
NetR14_1: R14.1 U5.1 | length 271.2
  Top Layer w6: v1(1433,1113) 1433,1069.09 1442.09,1060 U5.1
  Bottom Layer w6: v1(1433,1113) 1434.31,1114.31 1434.31,1132.31 1444,1142 R14.1
NetR20_1: R20.1 R21.2 U1.9 | length 588
  Top Layer w6: U1.9 669.19,76.41 669.19,237.51 685.31,253.62 685.31,419.31 v1(686,420)
  Bottom Layer w6: R21.2 620,503 630.98,492.02 655.99,492.02 686,462 v1(686,420)
NetR22_1: R22.1 U1.6 | length 2198.4
  Top Layer w6: U1.6 557.04,154.95 579.71,177.63 579.71,380.52 570.9,389.33 570.9,509.2 587,525.3 587,568.29 v1(586.79,568.5) ; v1(1789,1001) 1873,1001 1906,1034 v1(1945,1034)
  Bottom Layer w6: v1(586.79,568.5) 590.22,568.5 601.72,580 759.2,580 790.7,611.5 972.44,611.5 1007.94,647 1167.06,647 1521.06,1001 v1(1789,1001) ; v1(1945,1034) 1980,1034 2003,1057 R22.1
NetU3_1: U3.1 U4.5 | length 369.8
  Bottom Layer w15: U4.5 1666.02,514.02 1676.68,524.68 U3.1
NetU3_3: U3.3 U4.4 | length 449.2
  Bottom Layer w15: U4.4 1390.18,786.18 1400,796 1667.89,796 1676.68,787.21 U3.3
VBAT: C4.2 C6.2 C8.2 J2.1 R9.1 R14.2 R20.2 U2.5 U5.4 U6.3 | length 8159.1
  Top Layer w6: C4.2@1948,879 2039.21,879 2048,887.79 v1(2048,957) ; v1(2265,94) 2308,137 J2.1
  Top Layer w15: U2.5 1576,577.72 1576,670 1523,723 1523,926 1557.66,960.66 1557.66,981.87 1560.98,985.2 1766.18,985.2 1783.69,967.69 2037.31,967.69 v1(2048,957)
  Bottom Layer w6: R20.2 621,408 621,371.51 617.49,368 420.8,368 365,312.2 365,140.8 473.8,32 1359,32 1424.5,97.5 1750.83,97.5 1811.33,37 2208,37 v1(2265,94)
  Bottom Layer w15: U6.3 1388.55,1261.45 1418,1232 R14.2 ; C8.2 R14.2 ; R9.1 2014,801 2048,835 v1(2048,957) ; J2.1 3222,137 2508,851 2290,851 2184,957 v1(2048,957) ; R14.2 1708.38,1232 1973.69,966.69 2038.31,966.69 v1(2048,957)
  other v1: 2012,926 2081,926 2012,994 2081,994
VBUS: C14.2 D7.2 J1.1 U7.8 | length 2060.2
  Top Layer w6: v1(1116,519) 1116,456 1076,416 1076,361 v1(1075,360) 1077.72,357.28 1077.72,345.28 1088.5,334.5 1303.5,334.5 1381.35,256.65 v1(1381.35,159.65) v1(1381.35,124.65) 1382.7,123.3 v1@1383,123
  Top Layer w15: v1@1382.7,123.3 1521.3,123.3 1533.69,135.69 1533.69,165.82 J1.1
  Bottom Layer w6: U7.8 960.5,331.5 979,350 1034,350 1044,360 v1(1075,360) ; v1(1116,519) 1157,519 1166,510 C14.2
  Bottom Layer w15: v1(1381.35,124.65) 1384,122 1738,122 1864,248 2163,248 2189,274 2189,331.39 D7.2
pads on no net: J1.4 J1.6 J1.7 J1.10 J1.11 J1.S_1 J1.S_1_H1 J1.S_1_H2 J1.S_2 J1.S_2_H1 J1.S_2_H2 U1.19 U3.4 U4.1 U4.8 U7.1 U7.2 U7.9 U7.10 U7.12 U7.13 U7.14 U7.15 U7.16 U7.17 U7.18 U7.19 U7.20 U7.21 U7.22 U7.23 U7.24 U7.27 U7.28

## Keep-outs
Top Layer:
  lines w6: 2830,905 2830,1464 2876,1510 3454,1510 3495,1551 3495,1681 3519,1705 3654,1705 3680,1679 3680,491 3641,452 3470,452 3446,428 3446,277 3397,228 3172,228 3131,269 3131,810 3081,860 2875,860 2830,905
Keep-Out Layer:
  region: 0,830 330,830 330,0 0,0
  lines w6: 0,0 3741,0 3741,1772 0,1772 0,0

## Other copper
Top Layer:
  rectangle net VBUS: 1357,105 1409,176
  rectangle net VBAT: 1995,905 2101,1013
  region: 1357,176
  region net GND: 1539,1201 1539,1123 1544,1118 1597,1118 1623,1092 1623,1054 1608,1039 1515,1039 1515,1012 1516,1011 1627,1011 1651,1035 1713,1035 1720,1042 1720,1197 1711,1206 1544,1206
  region net GND: 1212,1362.01 1212,1248 1220,1240 1315,1240 1344,1211 1344,1076 1409,1011 1516,1011 1518,1013 1518,1036 1515,1039 1444,1039 1398,1085 1398,1350 1381,1367 1217.04,1367
  region net 3V4: 1152,1333
  region net 3V4: 1211,1234
  region: 1223,1210
  region net 3V4: 1087,1445 1076,1434 1076,975 1096,955 1165,955 1188,978 1188,1435 1178,1445
  region net NetL1_1: 1226,1189 1226,981 1240,967 1420,967 1513.37,967 1518,971.63 1518,997.37 1513.37,1002 1401,1002 1332,1071 1332,1191 1324,1199 1236,1199
Bottom Layer:
  rectangle net VBUS: 1357,105 1409,176
  rectangle net VBAT: 1995,905 2101.04,1013
  region: 1332,769

## Text inside footprints (layer, text, board x,y; h text height)
B1: Top Overlay "+" at 2421.91,1344 h112.5 r180
D1: Top Overlay "+" at 193.39,1472.19 h30 r90
D2: Top Overlay "+" at 193.39,874.19 h30 r90
D3: Top Overlay "+" at 193.39,1232.99 h30 r90
D4: Top Overlay "+" at 193.39,1352.59 h30 r90
D5: Top Overlay "+" at 193.39,1113.39 h30 r90
D6: Top Overlay "+" at 193.39,993.79 h30 r90
D8: Top Overlay "+" at 1833.19,255.61 h30
D9: Top Overlay "+" at 1629.69,255.61 h30
D12: Top Overlay "+" at 1426.19,255.61 h30
U7: Bottom Overlay "*" at 973,466.9 h50